# Altium PCB E-01-MB.PcbDoc
Units mm, origin at the board's own origin, x right, y up, seen from the top; angles counter-clockwise.
Board outline 80 x 60 mm, 2 copper layers (Top Layer, Bottom Layer); 13 components, 14 nets, 93 pads, 0 vias.
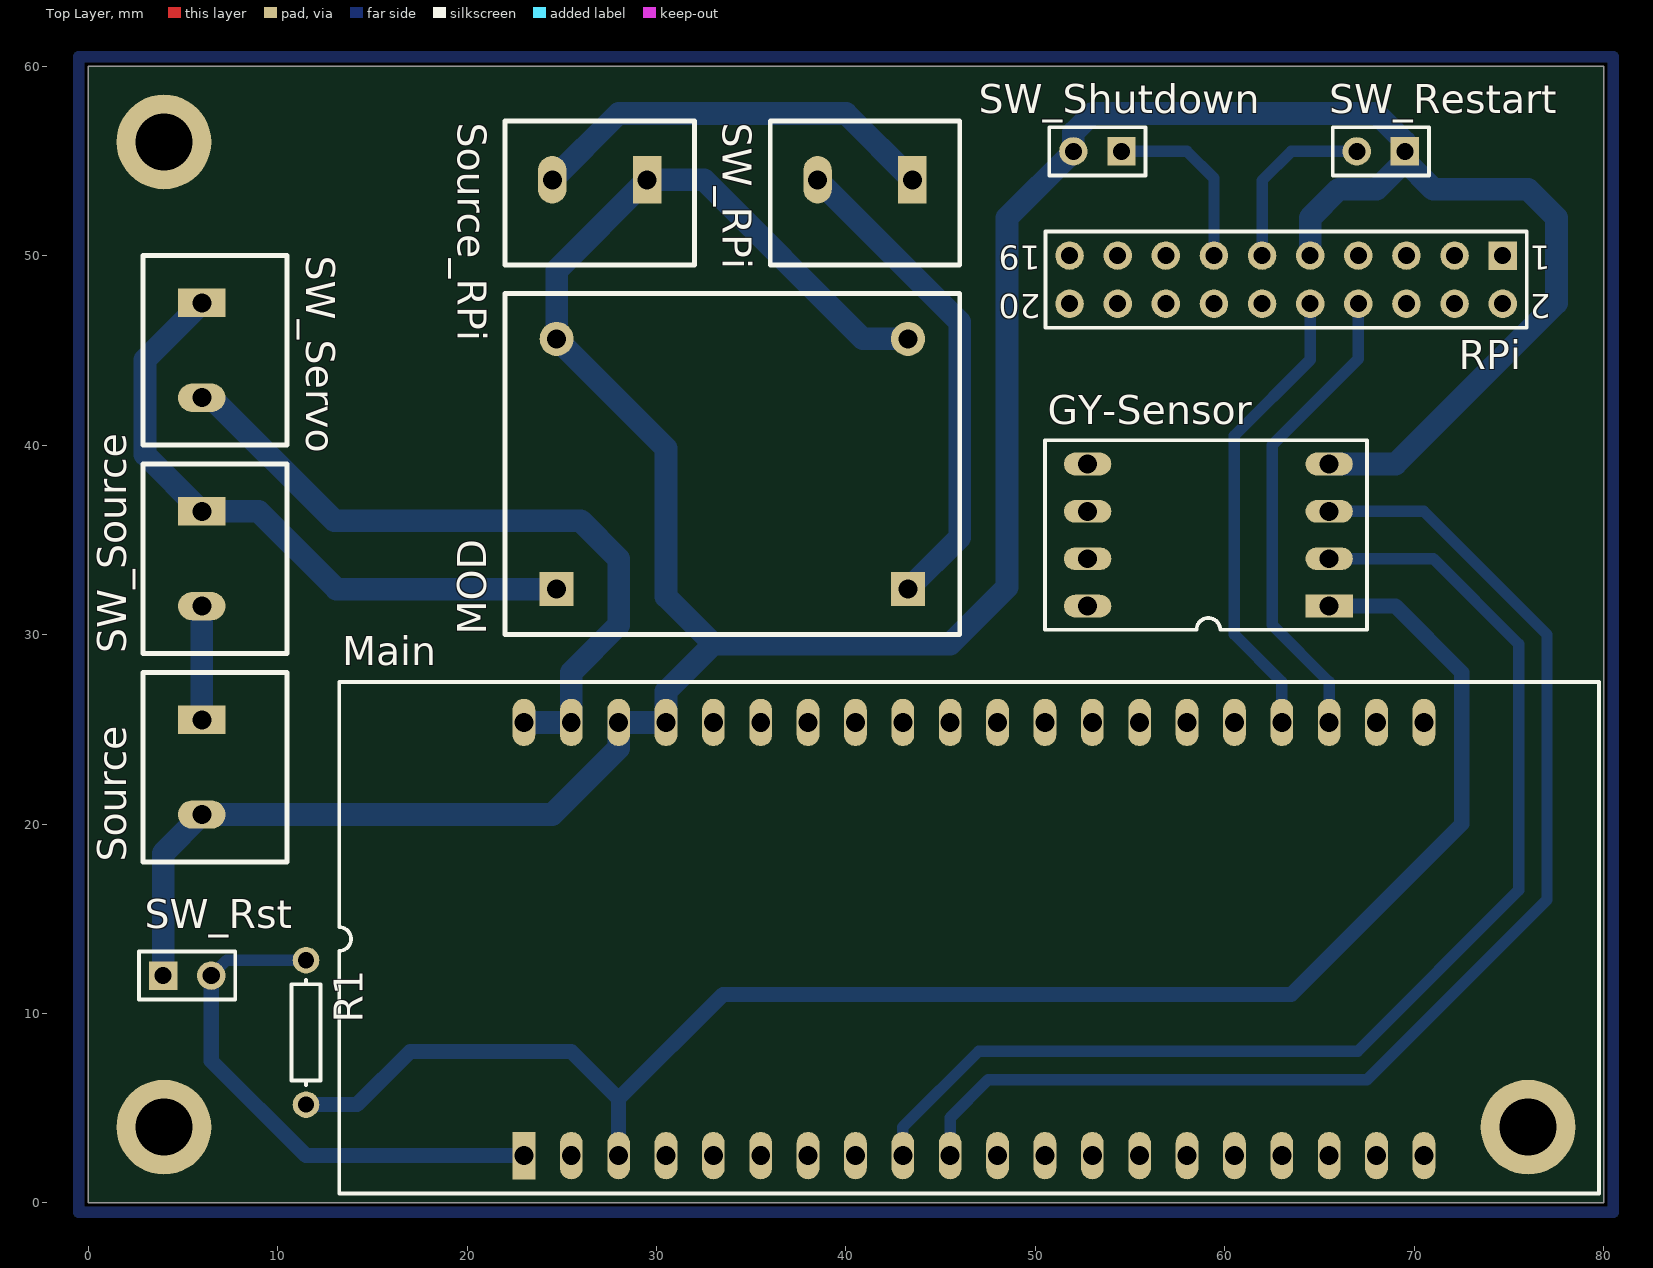
[diagram p0: Top Layer view]
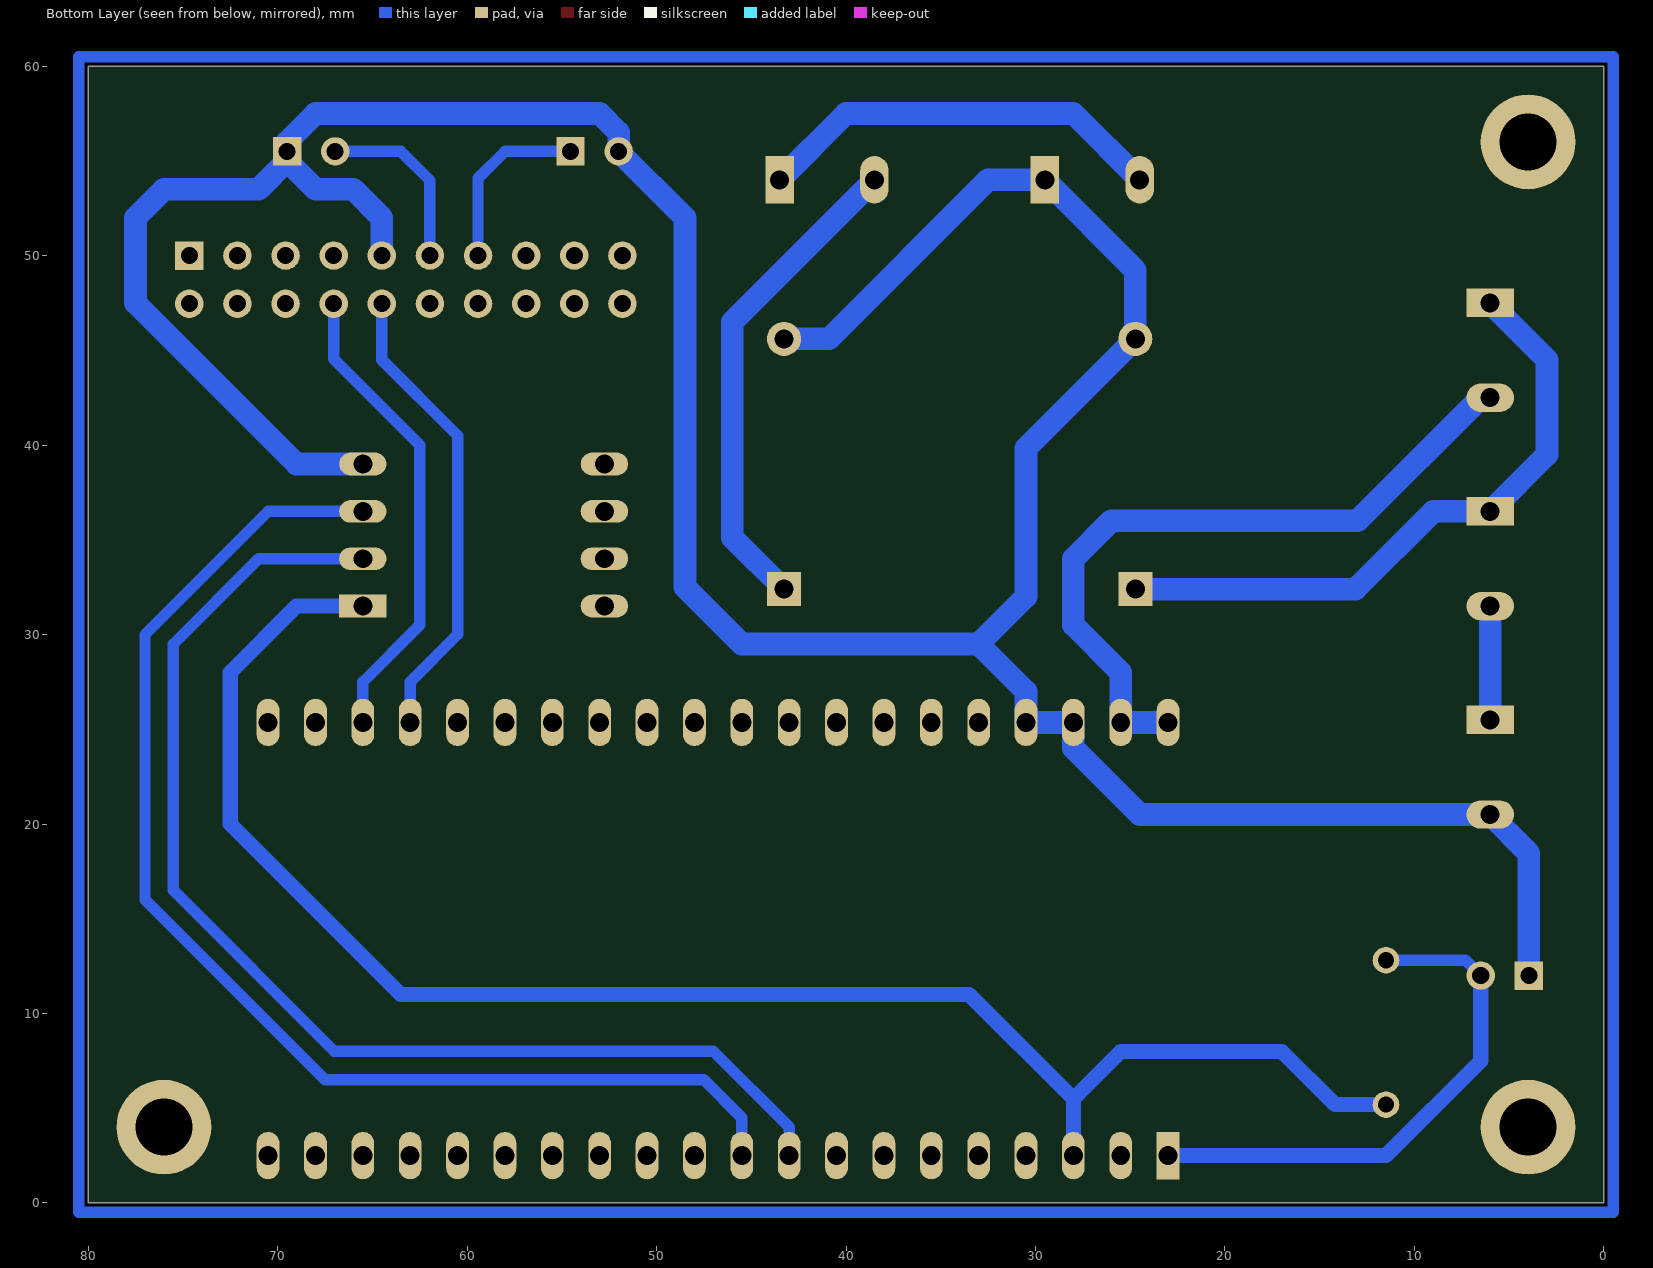
[diagram p1: Bottom Layer view, seen from below]

## Layer stack, top to bottom
Top Solder: solder mask 0.0102, Solder Resist, Dk 3.5
Top Layer: signal copper 0.0356
Dielectric 1: dielectric 0.32, FR-4, Dk 4.8
Bottom Layer: signal copper 0.0356
Bottom Solder: solder mask 0.0102, Solder Resist, Dk 3.5

## Board outline
0,60 80,60 80,0 0,0

## Design rules (kind name [scope] priority, off if disabled: settings)
Clearance [All] p1: gap=0.254 ignorepadtopadclearanceinfootprint=FALSE except(0: Arc-Hole Track-Hole SMDPad-Hole THPad-Hole Via-Hole Fill-Hole Poly-Hole Region-Hole Text-Hole)
PolygonConnect [All] p1: connectstyle=Relief reliefconductorwidth=0.254 reliefentries=4 polygonreliefangle="90 Angle" airgapwidth=0.254
RoutingVias [All] p1: holewidth=0.711 width=1.27 viastyle="Through Hole" minholewidth=0.711 minwidth=1.27 maxholewidth=0.711 maxwidth=1.27
SolderMaskExpansion [All] p1: expansion=0.102
Width [All] p1: maxlimit=1.2 minlimit=0.6 preferedwidth=0.8
30 further rules are at their usual default settings.

## Components (designator, comment, footprint, x,y, rotation, side; value= is the part's Value field where it differs from the comment)
GY-Sensor "GY25" GY25 65.5,31.5 r180 top
Main "OpenCM904" OpenCM904-DIP40 23,2.5 r90 top
MOD "MP1584EN" PCBComponent_1 34,39 r0 top
R1 "Res1" AXIAL-0.3 11.5,9 r270 top value=10K
RPi "Header 10X2" HDR2X10 74.66,50 r180 top
Source "KF301" KF301 6,25.5 r0 top
Source_RPi "KF301" KF301 29.5,54 r270 top
SW_Restart "Header 2" HDR1X2 69.5,55.5 r180 top
SW_RPi "KF301" KF301 43.5,54 r270 top
SW_Rst "Header 2" HDR1X2 3.96,12 r0 top
SW_Servo "KF301" KF301 6,47.5 r0 top
SW_Shutdown "Header 2" HDR1X2 54.54,55.5 r180 top
SW_Source "KF301" KF301 6,36.5 r0 top

## Footprints (in the part's own frame and the unit in brackets; to place one, negate y for a bottom-side part, rotate by r counter-clockwise, add the part's x,y. Pads: shape width x height; smd on the part's side, far side on the other; paste and mask are expansions set on the pad)
AXIAL-0.3 [mm] "Axial Device, Thru-Hole; 2 Leads; 0.3 in Pin Spacing"
  round 1.4 hole 0.85: 1(-3.81,0) 2(3.81,0)
  silkscreen extent -2.77,-0.76 2.77,0.76
GY25 [mm]
  rect 2.5x1.2 hole 1: 1(0,0)
  oval 2.5x1.2 hole 1: 2(0,-2.5) 3(0,-5) 4(0,-7.5) 5(12.75,-7.5) 6(12.75,-5) 7(12.75,-2.5) 8(12.75,0)
  silkscreen extent -2,-8.75 15,1.25
HDR1X2 [mm] "Connector; Header; 2 Position"
  rect 1.5x1.5 hole 0.9: 1(0,0)
  round 1.5 hole 0.9: 2(2.54,0)
  silkscreen extent -1.27,-1.27 3.81,1.27
HDR2X10 [mm] "Connector; Header; 10x2 Position"
  rect 1.5x1.5 hole 0.9: 1(0,0)
  round 1.5 hole 0.9: 2(0,2.54) 3(2.54,0) 4(2.54,2.54) 5(5.08,0) 6(5.08,2.54) 7(7.62,0) 8(7.62,2.54) 9(10.16,0) 10(10.16,2.54) 11(12.7,0) 12(12.7,2.54) 13(15.24,0) 14(15.24,2.54) 15(17.78,0) 16(17.78,2.54) 17(20.32,0) 18(20.32,2.54) 19(22.86,0) 20(22.86,2.54)
  silkscreen extent -1.27,-1.27 24.13,3.81
KF301 [mm]
  rect 2.5x1.5 hole 1: 1(0,0)
  oval 2.5x1.5 hole 1: 2(0,-5)
  silkscreen extent -3.1,-7.5 4.5,2.5
OpenCM904-DIP40 [mm]
  rect 2.5x1.2 hole 1: 1(0,0)
  oval 2.5x1.2 hole 1: 2(0,-2.5) 3(0,-5) 4(0,-7.5) 5(0,-10) 6(0,-12.5) 7(0,-15) 8(0,-17.5) 9(0,-20) 10(0,-22.5) 11(0,-25) 12(0,-27.5) 13(0,-30) 14(0,-32.5) 15(0,-35) 16(0,-37.5) 17(0,-40) 18(0,-42.5) 19(0,-45) 20(0,-47.5) 21(22.86,-47.5) 22(22.86,-45) 23(22.86,-42.5) 24(22.86,-40) 25(22.86,-37.5) 26(22.86,-35) 27(22.86,-32.5) 28(22.86,-30) 29(22.86,-27.5) 30(22.86,-25) 31(22.86,-22.5) 32(22.86,-20) 33(22.86,-17.5) 34(22.86,-15) 35(22.86,-12.5) 36(22.86,-10) 37(22.86,-7.5) 38(22.86,-5) 39(22.86,-2.5) 40(22.86,0)
  silkscreen extent -2,-56.75 25,9.75
PCBComponent_1 [mm]
  round 1.8 hole 1: 1(-9.271,6.604) 3(9.271,6.604)
  rect 1.8x1.8 hole 1: 2(-9.271,-6.604) 4(9.271,-6.604)
  silkscreen extent -12,-9 12,9

## Part data
R1: "Resistor", LatestRevisionDate=17-Jul-2002, LatestRevisionNote="Re-released for DXP Platform.", PackageDescription="Axial Device, Thru-Hole; 2 Leads; 0.3 in Pin Spacing", PackageReference=AXIAL-0.3, Published=8-Jun-2000, Publisher="Altium Limited"
RPi: "Header, 10-Pin, Dual row", LatestRevisionDate=17-Jul-2002, LatestRevisionNote="Re-released for DXP Platform.", Publisher="Altium Limited"
SW_Restart SW_Rst SW_Shutdown: "Header, 2-Pin", LatestRevisionDate=17-Jul-2002, LatestRevisionNote="Re-released for DXP Platform.", Publisher="Altium Limited"

## Free pads (board coordinates)
  round 5 hole 3: 2(4,4) 2(4,56) 3(76,4)

## Nets (pads, with @x,y where several pads share a name; then routed paths per layer and width w, separated by ;. In a path a pad name is that pad's centre, name@x,y a point inside that pad or via, vN(x,y) a via of type N, cw(c..) or ccw(c..) an arc to the next point about the centre after c; other vN are vias at no path point)
+3.3: GY-Sensor.1 Main.3 R1.2 | length 88.7
  Bottom Layer w0.8: R1.2 14.19,5.19 17,8 25.5,8 28,5.5 ; Main.3 28,5.5 ; GY-Sensor.1 69,31.5 72.5,28 72.5,20 63.5,11 33.5,11 28,5.5
+5: MOD.4 SW_RPi.2 | length 25.8
  Bottom Layer w1.2: SW_RPi.2 46,46.5 46,35.125 MOD.4
+12: Source.1 SW_Source.2 | length 6
  Bottom Layer w1.2: Source.1 SW_Source.2
+12_Servo: Main.39 Main.40 SW_Servo.2 | length 37.7
  Bottom Layer w1.2: SW_Servo.2 6.5,42.5 13,36 26,36 28,34 28,30.5 25.5,28 Main.39 Main.40
GND: GY-Sensor.4 Main.37 Main.38 MOD.1 MOD.3 RPi.9 Source.2 Source_RPi.1 SW_Restart.1 SW_Rst.1 SW_Shutdown.2 | length 188.2
  Bottom Layer w1.2: SW_Rst.1 3.96,18.46 Source.2 24.5,20.5 28,24 Main.38 Main.37 30.5,27 33,29.5 ; MOD.3 40.896,45.604 32.5,54 Source_RPi.1 24.729,49.229 MOD.1 30.5,39.833 30.5,32 33,29.5 ; RPi.9 64.5,52 66,53.5 68,53.5 SW_Restart.1@69.5,55 ; GY-Sensor.4 69,39 77.5,47.5 77.5,52 76,53.5 71,53.5 SW_Restart.1@69.5,55 ; 33,29.5 45.5,29.5 48.5,32.5 48.5,52 SW_Shutdown.2 52,56.5 53,57.5 68,57.5 69.5,56 SW_Restart.1 SW_Restart.1@69.5,55
NetGY-Sensor_2: GY-Sensor.2 Main.9 | length 64
  Bottom Layer w0.6: Main.9 43,4 47,8 67,8 75.5,16.5 75.5,29.5 71,34 GY-Sensor.2
NetGY-Sensor_3: GY-Sensor.3 Main.10 | length 66.5
  Bottom Layer w0.6: Main.10 45.5,4.5 47.5,6.5 67.5,6.5 77,16 77,30 70.5,36.5 GY-Sensor.3
NetMain_1: Main.1 R1.1 SW_Rst.2 | length 28.4
  Bottom Layer w0.6: SW_Rst.2 7.31,12.81 R1.1
  Bottom Layer w0.8: SW_Rst.2 6.5,7.5 11.5,2.5 Main.1
NetMain_23: Main.23 RPi.8 | length 25.2
  Bottom Layer w0.6: Main.23 65.5,27.5 62.5,30.5 62.5,40 67.04,44.54 RPi.8
NetMain_24: Main.24 RPi.10 | length 24.8
  Bottom Layer w0.6: Main.24 63,27.5 60.5,30 60.5,40.5 64.5,44.5 RPi.10
NetMOD_2: MOD.2 SW_Servo.1 SW_Source.1 | length 33.9
  Bottom Layer w1.2: SW_Servo.1 3,44.5 3,39.5 SW_Source.1 9,36.5 13.104,32.396 MOD.2
NetSource_RPi_2: Source_RPi.2 SW_RPi.1 | length 21.9
  Bottom Layer w1.2: Source_RPi.2 28,57.5 40,57.5 SW_RPi.1
Restart: RPi.11 SW_Restart.2 | length 9.6
  Bottom Layer w0.6: RPi.11 61.96,53.96 63.5,55.5 SW_Restart.2
Shutdown: RPi.13 SW_Shutdown.1 | length 9.5
  Bottom Layer w0.6: SW_Shutdown.1 58,55.5 59.42,54.08 RPi.13
pads on no net: GY-Sensor.5 GY-Sensor.6 GY-Sensor.7 GY-Sensor.8 Main.2 Main.4 Main.5 Main.6 Main.7 Main.8 Main.11 Main.12 Main.13 Main.14 Main.15 Main.16 Main.17 Main.18 Main.19 Main.20 Main.21 Main.22 Main.25 Main.26 Main.27 Main.28 Main.29 Main.30 Main.31 Main.32 Main.33 Main.34 Main.35 Main.36 RPi.1 RPi.2 RPi.3 RPi.4 RPi.5 RPi.6 RPi.7 RPi.12 RPi.14 RPi.15 RPi.16 RPi.17 RPi.18 RPi.19 RPi.20
copper on no net: | length 284
  Bottom Layer w0.6: -0.5,-0.5 80.5,-0.5 80.5,60.5 -0.5,60.5 -0.5,-0.5

## Text inside footprints (layer, text, board x,y; h text height)
RPi: Top Overlay "20" at 50.276,47.968 h1.27 r180; Top Overlay "19" at 50.276,50.508 h1.27 r180; Top Overlay "1" at 77.2,50.508 h1.27 r180; Top Overlay "2" at 77.2,47.968 h1.27 r180